# Altium PCB PCB1.PcbDoc
Units mil, origin at the board's own origin, x right, y up, seen from the top; angles counter-clockwise.
Board outline 3200 x 1060 mil, 4 copper layers (Top Layer, Ground plane, Power plane, Bottom Layer); 137 components, 69 nets, 412 pads, 145 vias.
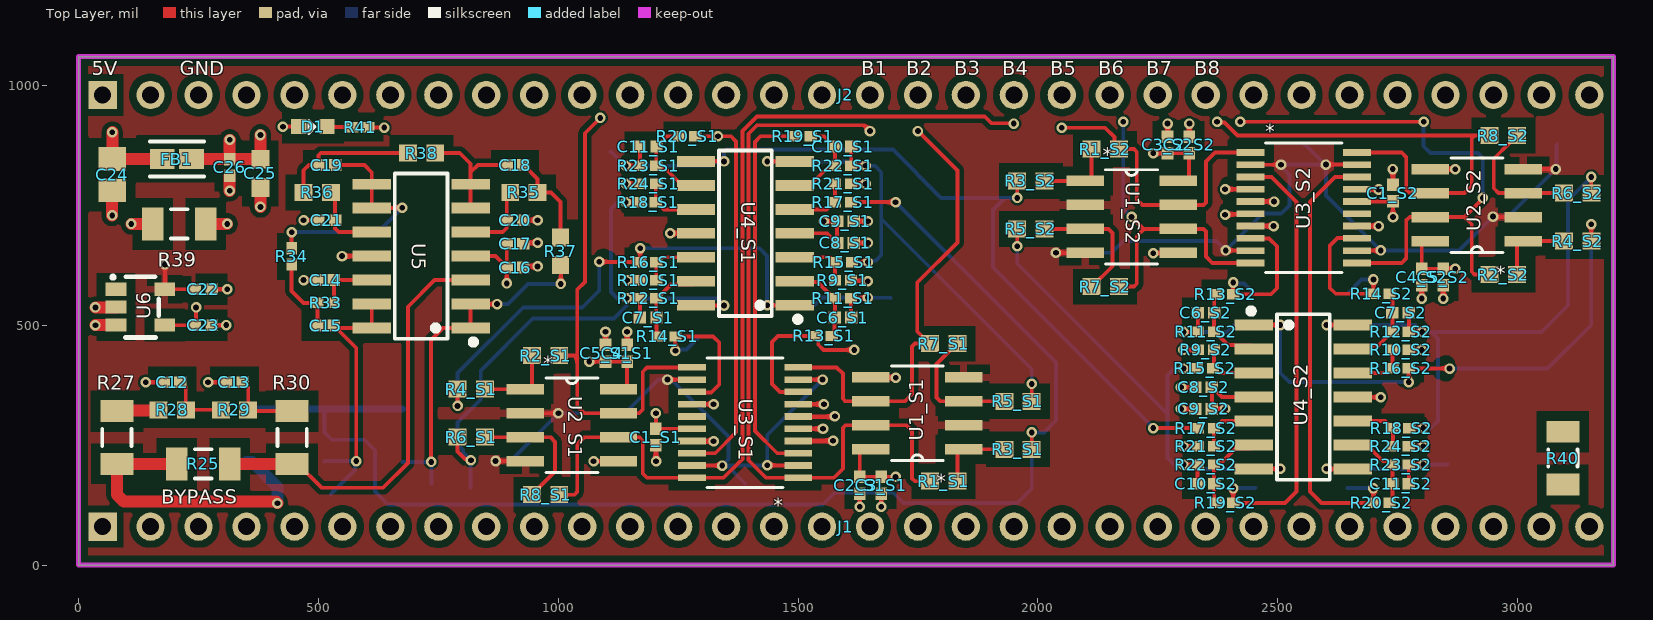
[diagram p0: Top Layer view]
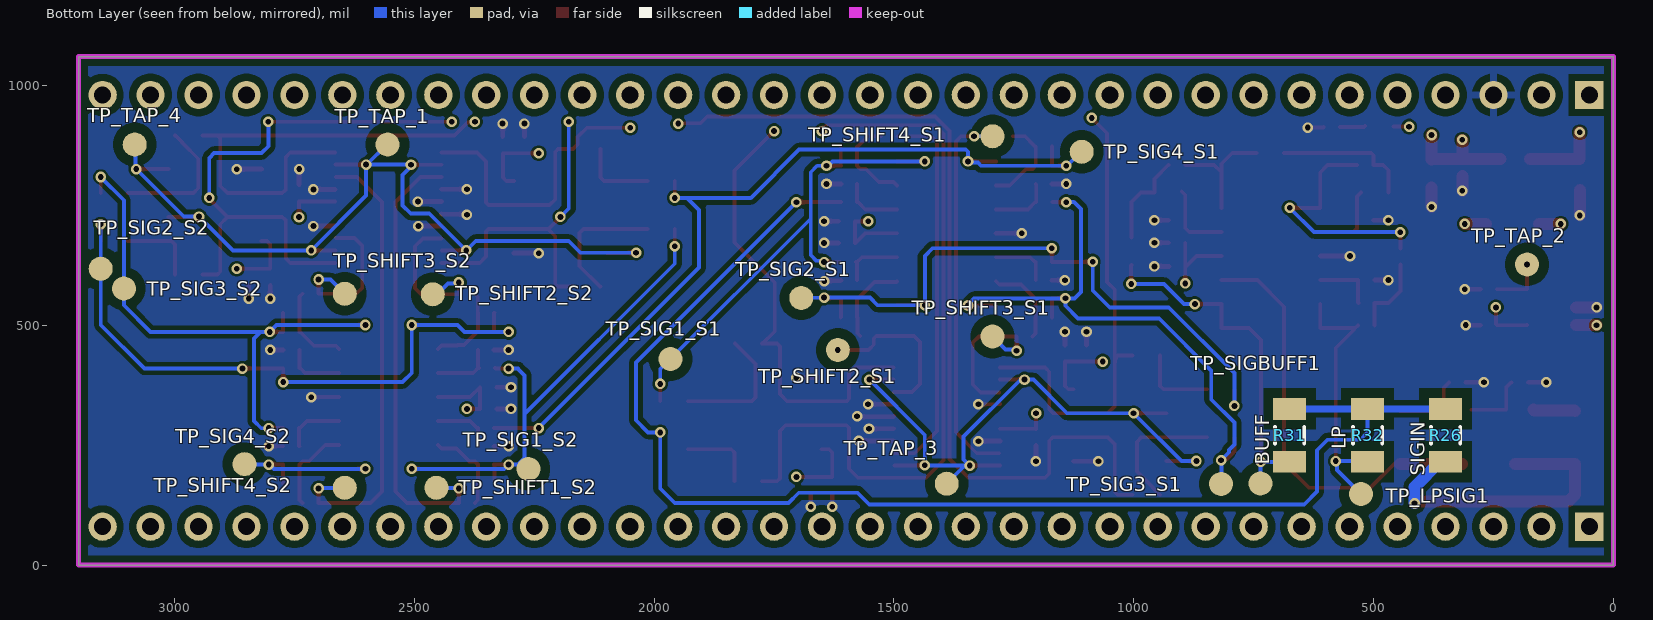
[diagram p1: Bottom Layer view, seen from below]
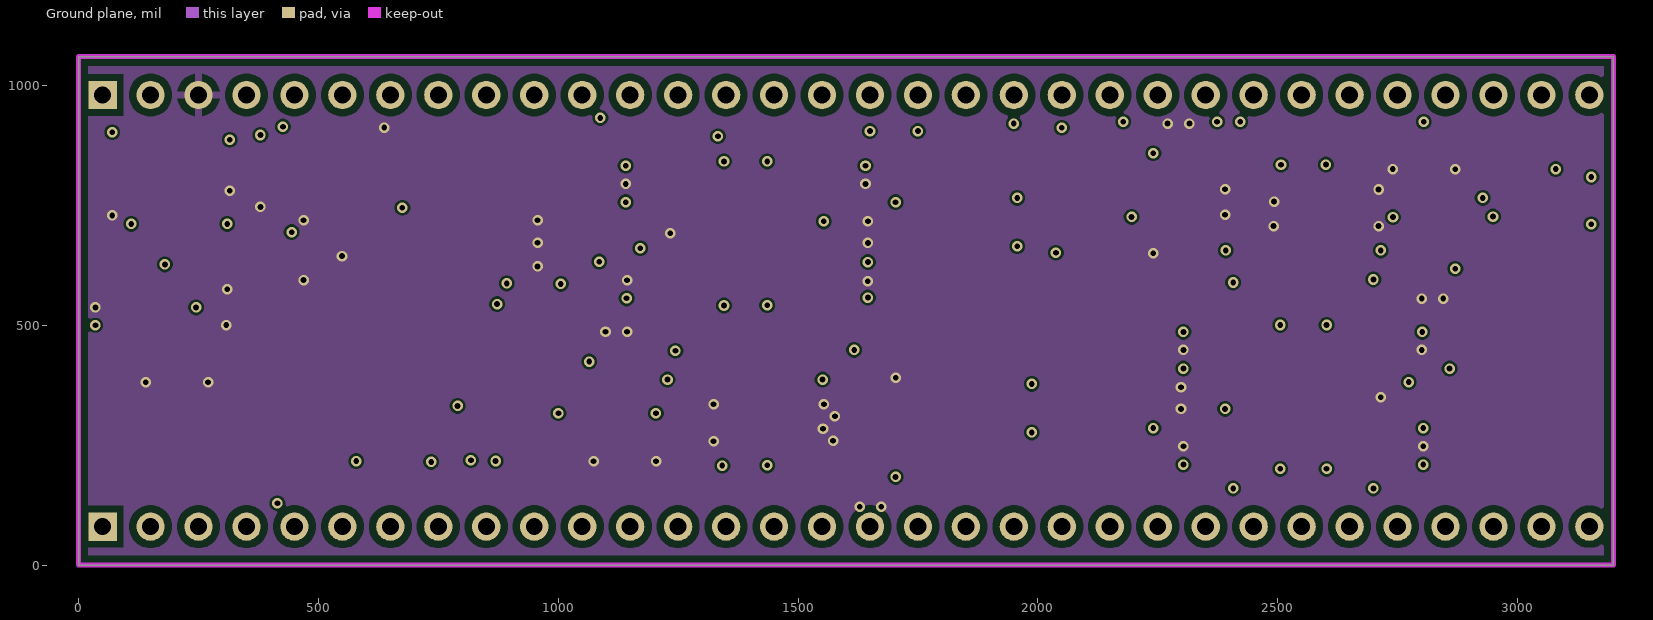
[diagram p2: Ground plane]
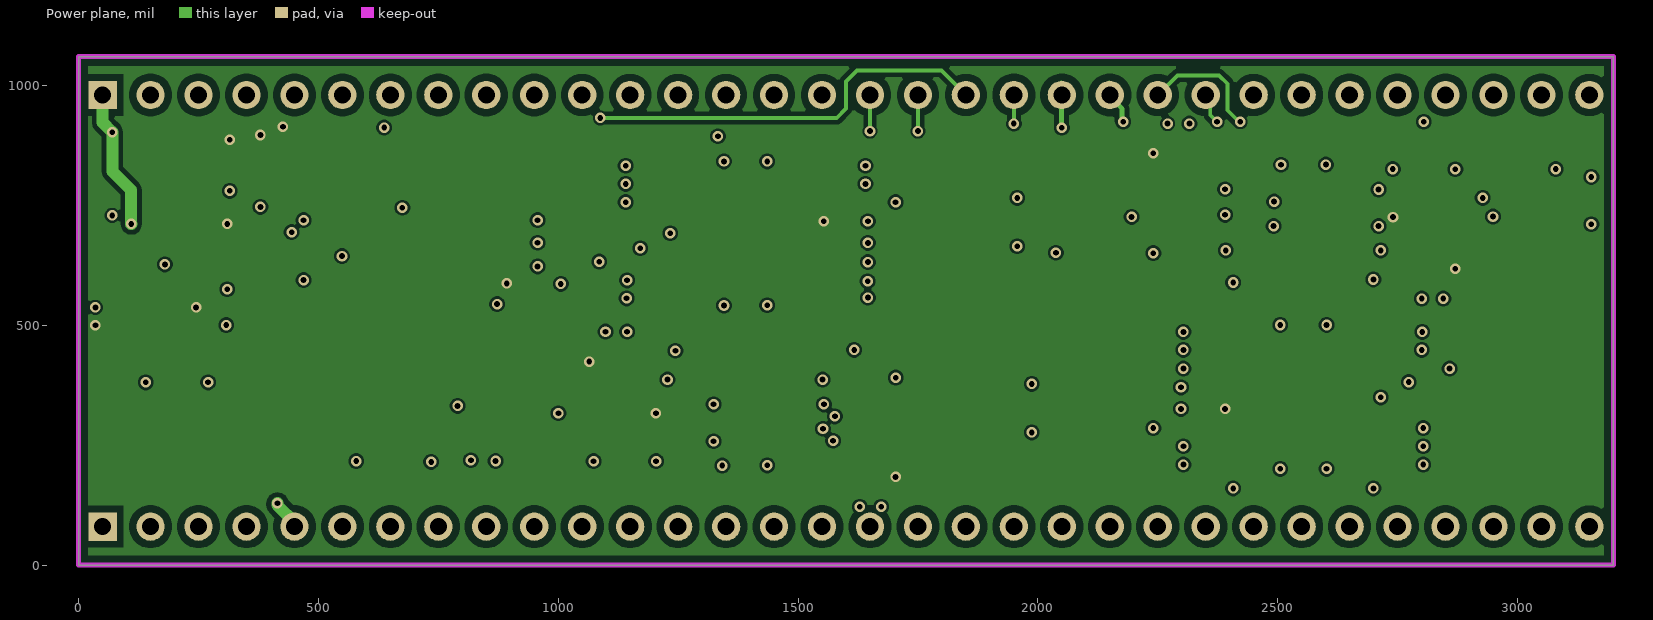
[diagram p3: Power plane]
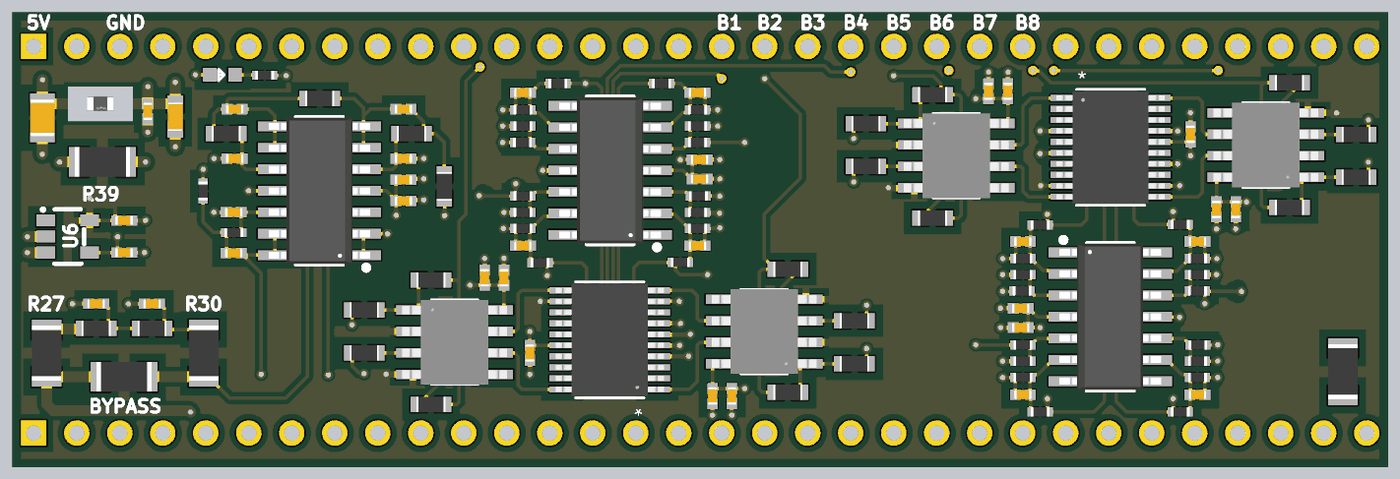
[diagram p4: 3D render of the assembled board from above, using the file's embedded part models]
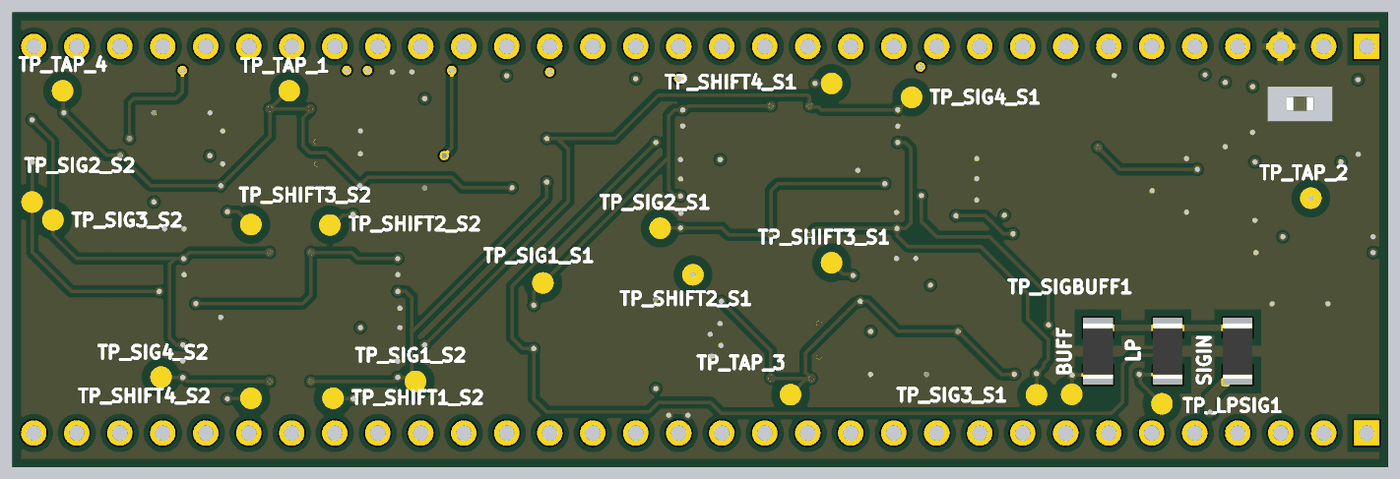
[diagram p5: 3D render of the assembled board from below, using the file's embedded part models]

## Layer stack, top to bottom
Top Solder: solder mask 0.4, Solder Resist, Dk 3.3
Top Layer: signal copper 1.4
Dielectric 1: prepreg 12.6, PP-006, Dk 4.1
Ground plane: signal copper 0.689
Dielectric1: core 12.6, FR-4, Dk 4.3
Power plane: signal copper 0.689
Dielectric 2: prepreg 12.6, PP-006, Dk 4.1
Bottom Layer: signal copper 1.4
Bottom Solder: solder mask 0.4, Solder Resist, Dk 3.3

## Board outline
0,0 3200,0 3200,1060 0,1060

## Design rules (kind name [scope] priority, off if disabled: settings)
Clearance Clearance_Poly_Via [InPoly vs IsVia] p1: gap=5 ignorepadtopadclearanceinfootprint=FALSE except(0: Arc-Hole Track-Hole SMDPad-Hole THPad-Hole Via-Hole Fill-Hole Poly-Hole Region-Hole Text-Hole)
Clearance Clearance_Poly_Poly [(InPoly) vs (InPoly)] p2: gap=15 ignorepadtopadclearanceinfootprint=FALSE except(0: Arc-Hole Track-Hole SMDPad-Hole THPad-Hole Via-Hole Fill-Hole Poly-Hole Region-Hole Text-Hole)
Clearance Clearance_Poly_Wires [InPoly vs IsWire] p3: gap=10 ignorepadtopadclearanceinfootprint=FALSE except(0: Arc-Hole Track-Hole SMDPad-Hole THPad-Hole Via-Hole Fill-Hole Poly-Hole Region-Hole Text-Hole)
Clearance Clearance_Poly_KO [(Layer = 'KeepOutLayer') vs (InPoly)] p4: gap=15 ignorepadtopadclearanceinfootprint=FALSE except(0: Arc-Hole Track-Hole SMDPad-Hole THPad-Hole Via-Hole Fill-Hole Poly-Hole Region-Hole Text-Hole)
Clearance Clearance_Poly_Top_Btm [OnLayer('Top Layer') or OnLayer('Bottom Layer') vs InPoly] p5: gap=20 ignorepadtopadclearanceinfootprint=FALSE except(0: Arc-Hole Track-Hole SMDPad-Hole THPad-Hole Via-Hole Fill-Hole Poly-Hole Region-Hole Text-Hole)
Clearance Clearance_KO_All [(Layer = 'KeepOutLayer')] p6: gap=0 ignorepadtopadclearanceinfootprint=FALSE
Clearance Clearance_Poly_All [(InPoly)] p7: gap=15 ignorepadtopadclearanceinfootprint=FALSE except(0: Arc-Hole Track-Hole SMDPad-Hole THPad-Hole Via-Hole Fill-Hole Poly-Hole Region-Hole Text-Hole)
Clearance Clearance_All [All] p8: gap=5 ignorepadtopadclearanceinfootprint=FALSE except(0: Arc-Hole Track-Hole SMDPad-Hole THPad-Hole Via-Hole Fill-Hole Poly-Hole Region-Hole Text-Hole)
ComponentClearance [All] p1 off: gap=10 collisioncheckmode=3 verticalgap=10 showdistances=FALSE
DiffPairsRouting [All] p1: maxlimit=10 minlimit=5 mostfreqgap=5 toplayer_minwidth=5 toplayer_maxwidth=25 toplayer_prefwidth=5 midlayer1_minwidth=5 midlayer1_maxwidth=25 midlayer1_prefwidth=5 midlayer2_minwidth=5 midlayer2_maxwidth=25 midlayer2_prefwidth=5 bottomlayer_minwidth=5 bottomlayer_maxwidth=25 bottomlayer_prefwidth=5 maxuncoupledlength=500
FabricationTestPointUsage TestPointUsage [All] p1 off: valid=0 allowmultiple=FALSE
FabricationTestpoint Testpoint [All] p1 off: side=3 testpointundercomponent=TRUE minsize=40 maxsize=100 preferedsize=60 minholesize=0 maxholesize=40 preferedholesize=32 testpointgrid=1 allowsidetop=TRUE allowsidebottom=TRUE usegrid=TRUE gridtolerance=0.01
FanoutControl Fanout_BGA [IsBGA] p1 off: bgadir=Out bgaviamode=Centered fanoutstyle=Auto fanoutdirection=Alternating viagrid=1 // Fanout_BGA (Default Rule)
FanoutControl Fanout_LCC [IsLCC] p2 off: bgadir=Out bgaviamode=Centered fanoutstyle=Auto fanoutdirection=Alternating viagrid=1 // Fanout_LCC (Default Rule)
FanoutControl Fanout_SOIC [IsSOIC] p3 off: bgadir=Out bgaviamode=Centered fanoutstyle=Auto fanoutdirection=Alternating viagrid=1 // Fanout_SOIC (Default Rule)
FanoutControl Fanout_Small [(CompPinCount < 5)] p4 off: bgadir=Out bgaviamode=Centered fanoutstyle=Auto fanoutdirection=OutThenIn viagrid=1 // Fanout_Small (Default Rule)
FanoutControl Fanout_Default [All] p5 off: bgadir=Out bgaviamode=Centered fanoutstyle=Auto fanoutdirection=Alternating viagrid=1 // Fanout_Default (Default Rule)
Height [All] p1 off: minheight=0 maxheight=1000 prefheight=500
HoleSize [All] p1 off: absolutevalues=TRUE maxlimit=100 minlimit=1 maxpercent=80.000 minpercent=20.000
HoleToHoleClearance [All] p1 off: gap=10 allowstackedmicrovias=TRUE
LayerPairs [All] p1 off: enforce=TRUE
MinimumSolderMaskSliver [All] p1 off: minsoldermaskwidth=10
NetAntennae [All] p1 off: netantennaetolerance=0
PasteMaskExpansion [All] p1 off: expansion=0
PlaneClearance [All] p1 off: clearance=20
PlaneConnect [All] p1 off: planeconnectstyle=Relief reliefexpansion=20 reliefentries=4 reliefconductorwidth=20 reliefairgap=15
PolygonConnect PolygonConnect_vias [All vs isVia] p1: connectstyle=Direct reliefconductorwidth=10 reliefentries=4 polygonreliefangle="90 Angle" airgapwidth=10
PolygonConnect [All] p2: connectstyle=Relief reliefconductorwidth=15 reliefentries=4 polygonreliefangle="90 Angle" airgapwidth=15
RoutingCorners [All] p1 off: cornerstyle=45-Degree minsetback=100 maxsetback=100
RoutingLayers [All] p1 off: top layer_v5=FALSE mid layer 1_v5=TRUE mid layer 2_v5=TRUE bottom layer_v5=TRUE
RoutingPriority [All] p1 off: routingpriority=0
RoutingTopology [All] p1 off: topology=Shortest
RoutingVias [All] p1: holewidth=12 width=22 viastyle="Through Hole" minholewidth=6 minwidth=15 maxholewidth=50 maxwidth=50
SilkToSilkClearance [All] p1 off: silktosilkclearance=10
SilkToSolderMaskClearance SilkscreenOverComponentPads [IsPad] p1 off: minsilkscreentomaskgap=10 clearancetoexposedcopper=TRUE
SolderMaskExpansion SolderMaskExpansion_via [IsVia] p1: expansion=0 istentingtop=FALSE
SolderMaskExpansion [All] p2 off: expansion=4 istentingtop=FALSE
SupplyNets "Schematic Supply Nets_3" [InNet('GND')] p1: voltage=0.000
SupplyNets "Schematic Supply Nets_2" [InNet('TAP')] p2: voltage=0.000
SupplyNets "Schematic Supply Nets_1" [InNet('+5')] p3: voltage=0.000
SupplyNets "Schematic Supply Nets" [InNet('+5IN')] p4: voltage=0.000
Width [All] p1: maxlimit=100 minlimit=5 preferedwidth=8
6 further rules are at their usual default settings.

## Classes and differential pairs
channel class CtDPS_Stage: S1 S2
component class S2: C1_S2 C2_S2 C3_S2 C4_S2 C5_S2 C6_S2 C7_S2 C8_S2 C9_S2 C10_S2 C11_S2 R1_S2 R2_S2 R3_S2 R4_S2 R5_S2 R6_S2 R7_S2 R8_S2 R9_S2 R10_S2 R11_S2 R12_S2 R13_S2 R14_S2 R15_S2 R16_S2 R17_S2 R18_S2 R19_S2 R20_S2 R21_S2 R22_S2 R23_S2 R24_S2 TP_SHIFT1_S2 TP_SHIFT2_S2 TP_SHIFT3_S2 TP_SHIFT4_S2 TP_SIG1_S2 TP_SIG2_S2 TP_SIG3_S2 TP_SIG4_S2 U1_S2 U2_S2 U3_S2 U4_S2
component class S1: C1_S1 C2_S1 C3_S1 C4_S1 C5_S1 C6_S1 C7_S1 C8_S1 C9_S1 C10_S1 C11_S1 R1_S1 R2_S1 R3_S1 R4_S1 R5_S1 R6_S1 R7_S1 R8_S1 R9_S1 R10_S1 R11_S1 R12_S1 R13_S1 R14_S1 R15_S1 R16_S1 R17_S1 R18_S1 R19_S1 R20_S1 R21_S1 R22_S1 R23_S1 R24_S1 TP_SHIFT2_S1 TP_SHIFT3_S1 TP_SHIFT4_S1 TP_SIG1_S1 TP_SIG2_S1 TP_SIG3_S1 TP_SIG4_S1 U1_S1 U2_S1 U3_S1 U4_S1
component class CtDSP_IO: C12 C13 C14 C15 C16 C17 C18 C19 C20 C21 C22 C23 C24 C25 C26 D1 FB1 J1 J2 R25 R26 R27 R28 R29 R30 R31 R32 R33 R34 R35 R36 R37 R38 R39 R40 R41 TP_LPSIG1 TP_SIGBUFF1 TP_TAP_1 TP_TAP_2 TP_TAP_3 TP_TAP_4 U5 U6

## Components (designator, comment, footprint, x,y, rotation, side; value= is the part's Value field where it differs from the comment)
C1_S1 "100nF" C_0402 1203.61,266.54 r270 top (schematic designator C1)
C1_S2 "100nF" C_0402 2740.46,775.46 r90 top (schematic designator C1)
C2_S1 "100nF" C_0402 1628.61,166.28 r270 top (schematic designator C2)
C2_S2 "100nF" C_0402 2315.46,875.72 r90 top (schematic designator C2)
C3_S1 "2.2uF" C_0402 1673.61,166.28 r90 top (schematic designator C3)
C3_S2 "2.2uF" C_0402 2270.46,875.72 r270 top (schematic designator C3)
C4_S1 "100nF" C_0402 1143.61,441.54 r90 top (schematic designator C4)
C4_S2 "100nF" C_0402 2800.46,600.46 r270 top (schematic designator C4)
C5_S1 "2.2uF" C_0402 1098.61,441.54 r270 top (schematic designator C5)
C5_S2 "2.2uF" C_0402 2845.46,600.46 r90 top (schematic designator C5)
C6_S1 "1pF" C_0402 1593.61,516 r0 top (schematic designator C6)
C6_S2 "1pF" C_0402 2350.46,526 r180 top (schematic designator C6)
C7_S1 "1pF" C_0402 1187.61,516 r0 top (schematic designator C7)
C7_S2 "1pF" C_0402 2756.46,526 r180 top (schematic designator C7)
C8_S1 "100nF" C_0402 1598.61,671.54 r0 top (schematic designator C8)
C8_S2 "100nF" C_0402 2345.46,370.46 r180 top (schematic designator C8)
C9_S1 "10uF" C_0402 1598.61,716.54 r180 top (schematic designator C9)
C9_S2 "10uF" C_0402 2345.46,325.46 r0 top (schematic designator C9)
C10_S1 "1pF" C_0402 1593.61,872.54 r0 top (schematic designator C10)
C10_S2 "1pF" C_0402 2350.46,169.46 r180 top (schematic designator C10)
C11_S1 "1pF" C_0402 1187.61,872.54 r0 top (schematic designator C11)
C11_S2 "1pF" C_0402 2756.46,169.46 r180 top (schematic designator C11)
C12 "100nF" C_0402 195,380.88 r0 top
C13 "10nF" C_0402 325,380.88 r0 top
C14 "22nF" C_0402 515,594.03 r180 top locked
C15 "100nF" C_0402 515,499.21 r0 top locked
C16 "10uF" C_0402 910,620.25 r0 top locked
C17 "100nF" C_0402 910,669.63 r180 top locked
C18 "100nF" C_0402 910,834.01 r0 top locked
C19 "10nF" C_0402 517.36,834.01 r180 top locked
C20 "100nF" C_0402 910,719.01 r180 top locked
C21 "4.7nF" C_0402 517.36,719.01 r0 top locked
C22 "0.1uF" C_0402 260,575 r0 top
C23 "0.1uF" C_0402 260,500 r0 top
C24 "47uF" C_0805 70.21,813.95 r90 top
C25 "1uF" C_0603 379.07,816.45 r90 top
C26 "0.1uF" C_0402 314.88,829.05 r270 top
D1 "LED_0603" LED_6003 518.13,914.37 r180 top
FB1 "BLM18PG121SN1D" BLM18PG121SN1D 204.88,846.38 r0 top
J1 "DIP32" DIP32 50,80 r0 top
J2 "DIP32" DIP32 50,980 r0 top
R1_S1 "47k" RES_0603 1803.61,174.73 r180 top locked (schematic designator R1)
R1_S2 "47k" RES_0603 2140.46,867.27 r0 top (schematic designator R1)
R2_S1 "47k" RES_0603 973.61,436.54 r0 top (schematic designator R2)
R2_S2 "47k" RES_0603 2970.46,605.46 r180 top (schematic designator R2)
R3_S1 "75" RES_0603 1958.61,241.28 r180 top locked (schematic designator R3)
R3_S2 "75" RES_0603 1985.46,800.72 r0 top (schematic designator R3)
R4_S1 "75" RES_0603 818.61,366.54 r0 top (schematic designator R4)
R4_S2 "75" RES_0603 3125.46,675.46 r180 top (schematic designator R4)
R5_S1 "75" RES_0603 1958.61,341.28 r180 top locked (schematic designator R5)
R5_S2 "75" RES_0603 1985.46,700.72 r0 top (schematic designator R5)
R6_S1 "75" RES_0603 818.61,266.54 r0 top (schematic designator R6)
R6_S2 "75" RES_0603 3125.46,775.46 r180 top (schematic designator R6)
R7_S1 "47k" RES_0603 1803.61,461.54 r180 top locked (schematic designator R7)
R7_S2 "47k" RES_0603 2140.46,580.46 r0 top (schematic designator R7)
R8_S1 "47k" RES_0603 973.61,146.54 r0 top (schematic designator R8)
R8_S2 "47k" RES_0603 2970.46,895.46 r180 top (schematic designator R8)
R9_S1 "10K" RES_0402 1593.61,593.56 r0 top (schematic designator R9)
R9_S2 "10K" RES_0402 2350.46,448.44 r180 top (schematic designator R9)
R10_S1 "10K" RES_0402 1187.61,593.56 r180 top (schematic designator R10)
R10_S2 "10K" RES_0402 2756.46,448.44 r0 top (schematic designator R10)
R11_S1 "10K" RES_0402 1593.61,556 r0 top (schematic designator R11)
R11_S2 "10K" RES_0402 2350.46,486 r180 top (schematic designator R11)
R12_S1 "10K" RES_0402 1187.61,556 r0 top (schematic designator R12)
R12_S2 "10K" RES_0402 2756.46,486 r180 top (schematic designator R12)
R13_S1 "5K" RES_0402 1553.61,477.5 r0 top (schematic designator R13)
R13_S2 "5K" RES_0402 2390.46,564.5 r180 top (schematic designator R13)
R14_S1 "5K" RES_0402 1227.61,476.54 r0 top (schematic designator R14)
R14_S2 "5K" RES_0402 2716.46,565.46 r180 top (schematic designator R14)
R15_S1 "5K" RES_0402 1595.61,631.54 r180 top (schematic designator R15)
R15_S2 "5K" RES_0402 2348.46,410.46 r0 top (schematic designator R15)
R16_S1 "5K" RES_0402 1187.61,631.54 r180 top (schematic designator R16)
R16_S2 "5K" RES_0402 2756.46,410.46 r0 top (schematic designator R16)
R17_S1 "5K" RES_0402 1593.61,756.54 r180 top (schematic designator R17)
R17_S2 "5K" RES_0402 2350.46,285.46 r0 top (schematic designator R17)
R18_S1 "5K" RES_0402 1186.61,756.54 r180 top (schematic designator R18)
R18_S2 "5K" RES_0402 2757.46,285.46 r0 top (schematic designator R18)
R19_S1 "5K" RES_0402 1510,893.92 r0 top (schematic designator R19)
R19_S2 "5K" RES_0402 2390.46,129.46 r180 top (schematic designator R19)
R20_S1 "5K" RES_0402 1269,893.92 r0 top (schematic designator R20)
R20_S2 "5K" RES_0402 2716.46,129.46 r180 top (schematic designator R20)
R21_S1 "10K" RES_0402 1593.61,794.54 r180 top (schematic designator R21)
R21_S2 "10K" RES_0402 2350.46,247.46 r0 top (schematic designator R21)
R22_S1 "10K" RES_0402 1593.61,832.54 r0 top (schematic designator R22)
R22_S2 "10K" RES_0402 2350.46,209.46 r180 top (schematic designator R22)
R23_S1 "10K" RES_0402 1187.61,832.54 r0 top (schematic designator R23)
R23_S2 "10K" RES_0402 2756.46,209.46 r180 top (schematic designator R23)
R24_S1 "10K" RES_0402 1187.61,794.54 r0 top (schematic designator R24)
R24_S2 "10K" RES_0402 2756.46,247.46 r180 top (schematic designator R24)
R25 "0" RES_1206 260,210.76 r0 top
R26 "0" RES_1206 350,270.35 r90 bottom
R27 "0" RES_1206 80,265.88 r90 top
R28 "330" RES_0603 195,323.62 r0 top
R29 "3.3k" RES_0603 325,323.62 r0 top
R30 "0" RES_1206 445,265.88 r270 top
R31 "0" RES_1206 675,270.35 r90 bottom
R32 "0" RES_1206 512.5,270.35 r90 bottom
R33 "220" RES_0402 515,546.62 r180 top locked
R34 "470" RES_0402 444.14,643.52 r90 top locked
R35 "330" RES_0603 928.46,776.76 r180 top locked
R36 "2.2k" RES_0603 497.68,776.76 r180 top locked
R37 "150" RES_0603 1005,654.01 r90 top locked
R38 "3.3k" RES_0603 715,859.01 r0 top locked
R39 "0" RES_1206 209.88,711.15 r0 top
R40 "0" RES_1206 3094.53,222.96 r270 top
R41 "1k" RES_0402 587,913 r0 top
TP_LPSIG1 "TESTPOINT" TESTPOINT 526.22,148.05 r90 bottom
TP_SHIFT1_S2 "TESTPOINT" TESTPOINT 2454,161 r90 bottom (schematic designator TP_SHIFT1)
TP_SHIFT2_S1 "TESTPOINT" TESTPOINT 1616.98,448.44 r90 bottom (schematic designator TP_SHIFT2)
TP_SHIFT2_S2 "TESTPOINT" TESTPOINT 2461.46,564.5 r90 bottom (schematic designator TP_SHIFT2)
TP_SHIFT3_S1 "TESTPOINT" TESTPOINT 1294.53,476.54 r90 bottom (schematic designator TP_SHIFT3)
TP_SHIFT3_S2 "TESTPOINT" TESTPOINT 2645,565.46 r90 bottom (schematic designator TP_SHIFT3)
TP_SHIFT4_S1 "TESTPOINT" TESTPOINT 1294.53,893.92 r90 bottom (schematic designator TP_SHIFT4)
TP_SHIFT4_S2 "TESTPOINT" TESTPOINT 2645,161 r90 bottom (schematic designator TP_SHIFT4)
TP_SIG1_S1 "TESTPOINT" TESTPOINT 1965.98,429.52 r90 bottom (schematic designator TP_SIG1)
TP_SIG1_S2 "TESTPOINT" TESTPOINT 2262.19,200.4 r90 bottom (schematic designator TP_SIG1)
TP_SIG2_S1 "TESTPOINT" TESTPOINT 1693.29,556.8 r90 bottom (schematic designator TP_SIG2)
TP_SIG2_S2 "TESTPOINT" TESTPOINT 3154.01,617.79 r90 bottom (schematic designator TP_SIG2)
TP_SIG3_S1 "TESTPOINT" TESTPOINT 818,169 r90 bottom (schematic designator TP_SIG3)
TP_SIG3_S2 "TESTPOINT" TESTPOINT 3105.46,576.25 r90 bottom (schematic designator TP_SIG3)
TP_SIG4_S1 "TESTPOINT" TESTPOINT 1108.51,861.53 r90 bottom (schematic designator TP_SIG4)
TP_SIG4_S2 "TESTPOINT" TESTPOINT 2854.06,210.28 r90 bottom (schematic designator TP_SIG4)
TP_SIGBUFF1 "TESTPOINT" TESTPOINT 736,170 r90 bottom
TP_TAP_1 "TESTPOINT" TESTPOINT 2555.86,876.73 r90 bottom
TP_TAP_2 "TESTPOINT" TESTPOINT 180.01,626.79 r90 bottom
TP_TAP_3 "TESTPOINT" TESTPOINT 1389.92,169.46 r90 bottom
TP_TAP_4 "TP_TAP_4" TESTPOINT 3083.02,876.73 r90 bottom
U1_S1 "TLV3502AIDR" TLV3502AIDR 1748.61,316.28 r180 top locked (schematic designator U1)
U1_S2 "TLV3502AIDR" TLV3502AIDR 2195.46,725.72 r0 top (schematic designator U1)
U2_S1 "TLV3502AIDR" TLV3502AIDR 1028.61,291.54 r0 top (schematic designator U2)
U2_S2 "TLV3502AIDR" TLV3502AIDR 2915.46,750.46 r180 top (schematic designator U2)
U3_S1 "ADG734BRUZ-REEL" ADG734BRUZ-REEL 1389.61,296.97 r180 top (schematic designator U3)
U3_S2 "ADG734BRUZ-REEL" ADG734BRUZ-REEL 2554.46,745.03 r0 top (schematic designator U3)
U4_S1 "ADA4891-4ARZ-R7" ADA4891-4ARZ-R7 1388.61,681.54 r180 top (schematic designator U4)
U4_S2 "ADA4891-4ARZ-R7" ADA4891-4ARZ-R7 2555.46,360.46 r0 top (schematic designator U4)
U5 "ADA4891-4ARZ-R7" ADA4891-4ARZ-R7 712.37,634.01 r180 top locked
U6 "REF2025AIDDCR" REF2025AIDDCR 77.7,574.98 r0 top

## Footprints (in the part's own frame and the unit in brackets; to place one, negate y for a bottom-side part, rotate by r counter-clockwise, add the part's x,y. Pads: shape width x height; smd on the part's side, far side on the other; paste and mask are expansions set on the pad)
ADA4891-4ARZ-R7 [mil]
  rect 80.24x22.6 smd: 1(-104.88,139.98) 2(-104.88,89.98) 3(-104.88,39.98) 4(-104.88,-10.02) 5(-104.88,-60.02) 6(-104.88,-110.02) 7(-104.88,-160.02) 8(101.34,-160.02) 9(101.34,-110.02) 10(101.34,-60.02) 11(101.34,-10.02) 12(101.34,39.98) 13(101.34,89.98) 14(101.34,139.98)
  silkscreen extent -117,-183 53,175, body extent -120,-180 116,161, height 69
ADG734BRUZ-REEL [mil]
  rect 58x14 smd: 1(-111,115.16) 2(-111,89.57) 3(-111,63.98) 4(-111,38.39) 5(-111,12.8) 6(-111,-12.8) 7(-111,-38.39) 8(-111,-63.98) 9(-111,-89.57) 10(-111,-115.16) 11(111,-115.16) 12(111,-89.57) 13(111,-63.98) 14(111,-38.39) 15(111,-12.8) 16(111,12.8) 17(111,38.39) 18(111,63.98) 19(111,89.57) 20(111,115.16)
  silkscreen extent -79,-135 79,135, body extent -126,-130 126,130, height 47
BLM18PG121SN1D [mil]
  rect 51.42x41.66 smd paste+0 mask+0: 1(-30.55,0) 2(30.55,0)
  silkscreen extent -56,-37 56,37, body extent -76,-41 76,41, height 10
C_0402 [mm]
  rect 0.66x0.62 smd paste+0 mask+0.051: 1(-0.44,0) 2(0.44,0)
  body extent -0.53,-0.28 0.53,0.28, height 0.55
C_0603 [mm]
  rect 1x0.95 smd: 1(-0.75,0) 2(0.75,0)
  body extent -0.85,-0.45 0.85,0.45, height 0.9
C_0805 [mm]
  rect 1.25x1.45 smd: 1(-0.825,0) 2(0.825,0)
  body extent -1.1,-0.72 1.1,0.72, height 1.45
DIP32 [mm]
  rect 1.5x1.5 hole 0.9: 1(0,0)
  round 1.5 hole 0.9: 2(2.54,0) 3(5.08,0) 4(7.62,0) 5(10.16,0) 6(12.7,0) 7(15.24,0) 8(17.78,0) 9(20.32,0) 10(22.86,0) 11(25.4,0) 12(27.94,0) 13(30.48,0) 14(33.02,0) 15(35.56,0) 16(38.1,0) 17(40.64,0) 18(43.18,0) 19(45.72,0) 20(48.26,0) 21(50.8,0) 22(53.34,0) 23(55.88,0) 24(58.42,0) 25(60.96,0) 26(63.5,0) 27(66.04,0) 28(68.58,0) 29(71.12,0) 30(73.66,0) 31(76.2,0) 32(78.74,0)
LED_6003 [mm]
  rect 0.8x0.8 smd: 1(0.004,0.009) 2(1.502,0.009)
  silkscreen extent 0.63,-0.31 0.97,0.37, body extent -0.05,-0.39 1.55,0.41, height 0.35
REF2025AIDDCR [mm]
  rect 1.1x0.7 smd: 1(0.006,0.002) 2(0.006,-0.947) 3(0.006,-1.899) 4(2.594,-1.899) 5(2.594,0)
  silkscreen extent -0.22,-2.56 2.27,0.7
RES_0402 [mm]
  rect 0.65x0.55 smd paste+0 mask+0.05: 1(-0.425,0) 2(0.425,0)
  body extent -0.55,-0.28 0.55,0.28, height 0.35
RES_0603 [mm]
  rect 0.95x0.9 smd: 1(-0.725,0) 2(0.725,0)
  body extent -0.85,-0.45 0.85,0.45, height 0.55
RES_1206 [mm]
  rect 1.15x1.75 smd: 1(-1.4,0) 2(1.4,0)
  silkscreen extent -0.45,-0.77 0.45,0.77, body extent -1.63,-0.87 1.63,0.87, height 0.65
TESTPOINT [mil]
  round 50 smd paste-99999 mask+0: 1(0,0)
TLV3502AIDR [mil]
  rect 78x22 smd: 1(-97,75) 2(-97,25) 3(-97,-25) 4(-97,-75) 5(97,-75) 6(97,-25) 7(97,25) 8(97,75)
  silkscreen extent -54,-98 54,98, body extent -122,-99 122,99, height 69

## Part data
C1_S1 C1_S2 C2_S1 C2_S2 C4_S1 C4_S2 C8_S1 C8_S2 C12 C15 C17 C18 C20 C22 C23 C26: library part C_0402, LCSC Part #=C1525
C3_S1 C3_S2 C5_S1 C5_S2: library part C_0402, LCSC Part #=C12530
C6_S1 C6_S2 C7_S1 C7_S2 C10_S1 C10_S2 C11_S1 C11_S2: library part C_0402, LCSC Part #=C1550
C9_S1 C9_S2 C16: library part C_0402, LCSC Part #=C15525
C13 C19: library part C_0402, LCSC Part #=C15195
C14: library part C_0402, LCSC Part #=C1532
C21: library part C_0402, LCSC Part #=C1538
C24: library part C_0805, LCSC Part #=C16780
C25: library part C_0603, LCSC Part #=C15849
D1: LCSC Part #=C2286
FB1: "-55℃~+125℃ 1 120Ω@100MHz 2A 50mΩ ±25% 0603 Ferrite Beads ROHS", LCSC Part #=C14709
R1_S1 R1_S2 R2_S1 R2_S2 R7_S1 R7_S2 R8_S1 R8_S2: library part RES_0603, LCSC Part #=C25819
R3_S1 R3_S2 R4_S1 R4_S2 R5_S1 R5_S2 R6_S1 R6_S2: library part RES_0603, LCSC Part #=C4275
R9_S1 R9_S2 R10_S1 R10_S2 R11_S1 R11_S2 R12_S1 R12_S2 R21_S1 R21_S2 R22_S1 R22_S2 R23_S1 R23_S2 R24_S1 R24_S2: library part RES_0402, LCSC Part #=C25744
R13_S1 R13_S2 R14_S1 R14_S2 R15_S1 R15_S2 R16_S1 R16_S2 R17_S1 R17_S2 R18_S1 R18_S2 R19_S1 R19_S2 R20_S1 R20_S2: library part RES_0402, LCSC Part #=C5948099
R25 R26 R27 R30 R31 R32 R39 R40: library part RES_1206, LCSC Part #=C17888
R28 R35: library part RES_0603, LCSC Part #=C23138
R29 R38: library part RES_0603, LCSC Part #=C22978
R33: library part RES_0402, LCSC Part #=C25091
R34: library part RES_0402, LCSC Part #=C25117
R36: library part RES_0603, LCSC Part #=C4190
R37: library part RES_0603, LCSC Part #=C22808
R41: library part RES_0402, LCSC Part #=C11702
TP_TAP_4: library part TESTPOINT
U1_S1 U1_S2 U2_S1 U2_S2: "Dual 4.5ns Push-pull Rail-to-Rail Input, Rail-to-Rail Output TTL Comparators", LCSC Part #=C131165
U3_S1 U3_S2: LCSC Part #=C579105
U4_S1 U4_S2 U5: "Quad Rail-to-Rail Op-Amp, 240 MHz, 170 V/µs, SOT-23-5", LCSC Part #=C654290
U6: LCSC Part #=C962078

## Via types
v1: diameter 22, hole 12, Top Layer to Bottom Layer, tented both sides, 137 vias
v2: diameter 22, hole 12, Top Layer to Bottom Layer, 8 vias

## Nets (pads, with @x,y where several pads share a name; then routed paths per layer and width w, separated by ;. In a path a pad name is that pad's centre, name@x,y a point inside that pad or via, vN(x,y) a via of type N, cw(c..) or ccw(c..) an arc to the next point about the centre after c; other vN are vias at no path point)
+5: C1_S1.1 C1_S2.1 C2_S1.1 C2_S2.1 C3_S1.2 C3_S2.2 C4_S1.1 C4_S2.1 C5_S1.2 C5_S2.2 C8_S1.1 C8_S2.1 C9_S1.2 C9_S2.2 C16.1 C17.2 C23.1 C25.2 C26.1 D1.2 FB1.2 R39.2 U1_S1.8 U1_S2.8 U2_S1.8 U2_S2.8 U3_S1.16 U3_S2.16 U4_S1.4 U4_S2.4 U5.4 U6.3 U6.4 | length 1768
  Top Layer w8: U6.4 180.01,500 C23.1 245,502.32 v1(245,536.98) ; v1(426,914) D1.2 ; U5.4 869.37,644.03 882.46,630.94 882.46,630.78 C16.1@890.67,622.58 ; v1(892.68,587) C16.1 ; C16.1@892.68,623.8 C17.2 C17.2@892.68,671.96 ; v1(1064.54,424.21) C5_S1.2 C4_S1.1 1143.61,373.54 1136.61,366.54 U2_S1.8 ; v1(1203.61,316.54) C1_S1.1 1203.92,284.17 U3_S1.16 ; U4_S1.4 1560.48,691.56 1580.5,671.54 C8_S1.1 C9_S1.2 v1(1553.61,716.54) ; U1_S1.8 1635.61,241.28 1628.61,234.28 C2_S1.1 C3_S1.2 v1(1703.27,183.6) ; v1(2240.8,858.4) C3_S2.2 C2_S2.1 2315.46,807.72 2308.46,800.72 U1_S2.8 ; v1(2390.46,325.46) C9_S2.2 C8_S2.1 2363.58,370.46 2383.59,350.44 U4_S2.4 ; U3_S2.16 2740.15,757.83 C1_S2.1 v1(2740.46,725.46) ; U2_S2.8 2807.46,675.46 2800.46,668.46 C4_S2.1 C5_S2.2 v1(2870.46,617.79)
  Top Layer w25: v1(35,500) 77.72,500 U6.3 ; FB1.2 C26.1 ; R39.2@265.09,711.06 v1(309.88,711.06) ; v1(315.18,886.57) 314.88,886.28 C26.1 ; v1(379.07,896.57) C25.2 378.67,846.38 C26.1
+5IN: C24.2 FB1.1 J2.1 R39.1 | length 498.7
  Top Layer w25: C24.2 v1@70.21,902.43 ; C24.2 FB1.1 ; v1(109.88,711.06) R39.1@154.68,711.06
  Power plane w25: J2.1 50,922.69 v1(70.24,902.45) 70.24,820.76 109.58,781.42 109.58,711.36 v1(109.88,711.06)
B1: J2.17 R1_S1.2 U1_S1.7 U3_S1.1 | length 1641.9
  Top Layer w8: v2(1650,904.75) 1637.75,917 1414.69,917 1396.99,899.3 1396.99,218.3 1433.48,181.81 U3_S1.1 1574.73,181.81 1593.61,200.69 1593.61,286.02 1598.86,291.28 1726.12,291.28 1737.73,279.67 1737.73,180.61 1743.61,174.73 R1_S1.2
  Power plane w8: J2.17@1649,1005 1650,1004 v2(1650,904.75)
B2: J2.18 R7_S1.2 U1_S1.6 U3_S1.10 | length 1065.4
  Top Layer w8: U3_S1.10 1580.44,412.13 1593.61,398.96 1593.61,346.54 1598.86,341.28 U1_S1.6 1722.42,341.28 1737.73,356.59 1737.73,455.65 1743.61,461.54 R7_S1.2@1774.08,461.54 ; v1(1750,904.75) 1832.15,822.6 1832.15,672.58 1748.61,589.03 1748.61,487.01 R7_S1.2@1774.08,461.54 ; R7_S1.2 R7_S1.2@1774.08,461.54
  Power plane w8: J2.18@1749,1005 1750,1004 v1(1750,904.75)
B3: J2.19 R2_S1.2 U2_S1.7 U3_S1.11 | length 1849
  Top Layer w8: R2_S1.2 1033.61,436.54 1039.49,430.65 ; v2(1087.78,932.25) 1087.49,932.25 1055.48,900.24 1055.48,589.99 1039.49,573.99 1039.49,430.65 ; U3_S1.11 1185.4,412.13 1176.11,402.84 1176.11,324.04 1168.61,316.54 U2_S1.7 1054.54,316.54 1039.49,331.59 1039.49,430.65
  Power plane w8: v2(1087.78,932.25) 1580.62,932.25 1600,951.63 1600,1008 1623,1031 1799,1031 J2.19
B4: J2.20 R8_S1.2 U2_S1.6 U3_S1.20 | length 1931.7
  Top Layer w8: R8_S1.2 1033.61,146.54 1039.49,152.42 1039.49,251.48 1054.54,266.54 U2_S1.6 1168.61,266.54 1176.11,259.04 1176.11,191.1 1185.4,181.81 U3_S1.20 1344.84,181.81 1383.99,220.96 1383.99,904.69 1414.3,935 1889.39,935 1903.45,920.94 1949.53,920.94 v2(1950,920.46)
  Power plane w8: v2(1950,920.46) J2.20 J2.20@1950,1003.14
B5: J2.21 R1_S2.2 U1_S2.7 U3_S2.1 | length 716.4
  Top Layer w8: v1(2050,911.64) 2140.22,911.64 2159.55,892.3 2159.55,876.73 R1_S2.2 2200.46,867.27 2206.34,861.39 2206.34,762.33 2217.95,750.72 U1_S2.7 2345.21,750.72 2350.46,755.98 2350.46,841.31 2369.34,860.19 U3_S2.1
  Power plane w10: J2.21@2049,1005 2049.5,1004.5 2049.5,912.14 v1(2050,911.64)
B6: J2.22 R7_S2.2 U1_S2.6 U3_S2.10 | length 777.2
  Top Layer w8: R7_S2.2 2200.46,580.46 2206.34,586.35 2206.34,685.41 2221.66,700.72 ; v2(2195.46,725.72) 2220.46,700.72 2221.66,700.72 ; U3_S2.10 2363.63,629.87 2350.46,643.04 2350.46,695.46 2345.21,700.72 U1_S2.6 2221.66,700.72
  Power plane w10: J2.22@2149,1005 2149.5,1004.5 J2.22@2149.5,980 ; J2.22 2150,976.69 2175.69,951 2175.69,926.55 v2(2177.98,924.25)
  Bottom Layer w8: v2(2177.98,924.25) 2177.98,743.2 v2(2195.46,725.72)
B7: J2.23 R2_S2.2 U2_S2.7 U3_S2.11 | length 1437.3
  Top Layer w8: v2(2422.11,924.25) v2(2804.57,924.25) ; U3_S2.11 2758.67,629.87 2767.96,639.16 2767.96,717.96 2775.46,725.46 U2_S2.7 2889.53,725.46 ; v1(2927.46,765.46) 2927.46,763.4 2889.53,725.46 ; R2_S2.2 2910.46,605.46 2904.58,611.35 2904.58,710.41 2889.53,725.46
  Power plane w8: J2.23 2290.91,1020.91 2377.87,1020.91 2395.46,1003.31 2395.46,948.26 2419.48,924.25 v2(2422.11,924.25)
  Bottom Layer w8: v2(2804.57,924.25) 2804.42,924.11 2804.42,873 2818.46,858.96 2917.46,858.96 2927.46,848.96 v1(2927.46,765.46)
B8: J2.24 R8_S2.2 U2_S2.6 U3_S2.20 | length 1074.8
  Top Layer w8: v2@2374.29,924.25 2375.68,922.87 2388.88,922.87 2416.28,895.46 2910.46,895.46 ; U3_S2.20 2758.67,860.19 2767.96,850.9 2767.96,782.96 2775.46,775.46 U2_S2.6 2889.53,775.46 2904.58,790.52 2904.58,889.58 2910.46,895.46 ; R8_S2.2 2910.46,895.46
  Power plane w8: J2.24@2349,1005 J2.24@2351.02,1005 ; J2.24 2359.52,970.48 2359.52,938.47 v2(2373.74,924.25)
GND: C1_S1.2 C1_S2.2 C2_S1.2 C2_S2.2 C3_S1.1 C3_S2.1 C4_S1.2 C4_S2.2 C5_S1.1 C5_S2.1 C8_S1.2 C8_S2.2 C9_S1.1 C9_S2.1 C12.1 C13.1 C14.2 C16.2 C17.1 C20.1 C21.1 C22.2 C23.2 C24.1 C25.1 C26.2 J2.3 R9_S1.2 R9_S2.2 R10_S1.2 R10_S2.2 R21_S1.1 R21_S2.1 R24_S1.1 R24_S2.1 R41.2 U1_S1.5 U1_S2.5 U2_S1.5 U2_S2.5 U3_S1.4 U3_S1.5 U3_S1.6 U3_S1.7 U3_S1.14 U3_S1.17 U3_S2.4 U3_S2.5 U3_S2.6 U3_S2.7 U3_S2.14 U3_S2.17 U4_S1.11 U4_S2.11 U5.11 U6.2 | length 2156.1
  Top Layer w8: R41.2 604.23,912.5 636.5,912.5 v1(637,912) ; U3_S1.14 1278.78,335.18 1323.82,335.18 v1(1324,335) ; U4_S2.11 2657.24,350.01 2714.56,350.01 v1(2714.99,349.58) ; R24_S2.1 v1(2803.46,247.46)
  Top Layer w10: U6.2@77.57,537.33 U6.2 ; v1(140,380.88) C12.1 ; v1(270,380.88) C13.1 ; C23.2 277.42,500.1 307.58,500.1 v1(307.68,500.2) ; C22.2 277.36,575.04 309.96,575.04 v1(310,575.08) ; C26.2 C26.2@315.03,811.58 ; v1@315.03,780.24 v1(315.18,780.09) ; v1(469.13,594.03) C14.2 ; v1(469.13,719.01) C21.1 ; v1(549.14,644.03) U5.11 ; C16.2@926.1,622.58 v1@955.12,622.58 ; C17.1@927.32,671.96 v1(957.01,671.96) ; C20.1 v1(957.01,719.01) ; v1(1073.61,216.54) U2_S1.5 ; C5_S1.1 v1(1098.61,486.54) ; v1(1140.61,794.54) R24_S1.1 ; C4_S1.2 v1(1143.61,486.54) ; v1(1143.61,593.56) R10_S1.2 ; C1_S1.2 1203.76,249.06 1203.76,216.69 v1(1203.92,216.54) ; v1(1233.61,691.56) U4_S1.11 ; U3_S1.17 1278.9,258.29 1323.71,258.29 v1(1324,258) ; U3_S1.4 1500.81,258.79 1572.79,258.79 v1(1573,259) ; U3_S1.5 1500.69,284.09 1551.91,284.09 v1(1552,284) ; U3_S1.6 1501.37,309 1576,309 v1(1577,310) ; U3_S1.7 1500.78,335.18 1553.82,335.18 v1(1554,335) ; R9_S1.2 1611.34,592.56 1644.13,592.56 v1(1645.13,591.56) ; R21_S1.1 v1(1640.61,794.54) ; C8_S1.2 v1(1645.61,671.54) ; C9_S1.1 v1(1645.61,716.54) ; v1(1628.61,121.54) C2_S1.2 ; U1_S1.5 1651.95,390.94 1703.27,390.94 v1(1703.61,390.6) ; v1(1673.61,121.54) C3_S1.1 ; v1(2240.8,650.22) 2241.05,650.47 2292.22,650.47 U1_S2.5 ; C3_S2.1 v1(2270.46,920.46) ; v1(2298.46,325.46) C9_S2.1 ; v1(2298.46,370.46) C8_S2.2 ; v1(2303.46,247.46) R21_S2.1 ; v1(2303.46,448.44) R9_S2.2 ; C2_S2.2 2315.71,893.29 2315.71,920.21 v1(2315.96,920.46) ; v1(2390.46,730.1) 2391.53,731.17 2442.4,731.17 U3_S2.6 ; v1(2390.46,783.42) U3_S2.4 ; U3_S2.7 v1(2491.49,706.65) ; U3_S2.5 v1(2492.46,757.83) ; U3_S2.14 v1(2710.46,706.65) ; U3_S2.17 2665.72,783.17 2710.21,783.17 v1(2710.46,782.92) ; v1(2740.15,825.46) 2740.31,825.31 2740.31,792.94 C1_S2.2 ; R10_S2.2 v1(2800.46,448.44) ; v1(2800.46,555.46) C4_S2.2 ; U2_S2.5 2818.54,825.39 2870.39,825.39 v1(2870.46,825.31) ; v1(2845.46,555.46) C5_S2.1
  Top Layer w25: v1@35.35,537.33 U6.2@77.57,537.33 ; v1(69.88,728.9) C24.1@69.88,781.42 ; v1@315.03,780.24 C26.2@315.03,811.58 ; v1(379.07,746.57) C25.1
  other v1: 35,536.98 957.01,622.58
LP_S1: C18.1 R38.2 U5.6 U5.7 | length 257.2
  Top Layer w8: R38.2 794.81,859.01 817.25,836.57 817.25,818.9 ; U5.6 U5.7 817.25,818.9 ; C18.1 832.36,834.01 817.25,818.9
LP_S2: C19.1 R34.2 U5.8 U5.9 | length 507.5
  Top Layer w8: R34.2 v1(444.14,694.03) ; C19.1 595.84,834.01 611.03,818.82 U5.8 U5.9 611.51,744.52 674.52,744.52 v1(675,745)
  Bottom Layer w8: v1(444.14,694.03) 624.03,694.03 v1(675,745)
LP_SIG: C15.2 R32.1 TP_LPSIG1.1 U5.13 U5.14 | length 582.7
  Top Layer w8: C15.2 533.11,499.21 C15.2@538.29,494.03 ; v1(579,216.69) 579,452.53 541.32,490.22 541.32,491.01 C15.2@538.29,494.03 ; U5.13 U5.14 C15.2@538.29,494.03
  Bottom Layer w8: R32.1 513.96,216.69 v1(579,216.69) 576.32,214.01 576.32,198.15 TP_LPSIG1.1
NetC6_S1_1: C6_S1.1 R11_S1.1 R13_S1.2 U4_S1.2 | length 179.3
  Top Layer w8: U4_S1.2 1495.06,589.99 1540.92,589.99 1574.91,556 R11_S1.1 1576.87,516.59 C6_S1.1 1576.28,483.45 R13_S1.2
NetC6_S2_1: C6_S2.1 R11_S2.1 R13_S2.2 U4_S2.2 | length 179.3
  Top Layer w8: R13_S2.2 2367.79,558.55 C6_S2.1 2367.2,525.41 R11_S2.1 2369.17,486 2396.7,458.46 2409.78,458.46 2410.5,457.74 2443.28,457.74 U4_S2.2
NetC7_S1_2: C7_S1.2 R12_S1.2 R14_S1.1 U4_S1.13 | length 179.8
  Top Layer w8: R14_S1.1 1204.93,482.48 C7_S1.2 1204.34,516.59 R12_S1.2 1206.31,556 1235.15,584.84 1280.56,584.84 U4_S1.13
NetC7_S2_2: C7_S2.2 R12_S2.2 R14_S2.1 U4_S2.13 | length 179.8
  Top Layer w8: U4_S2.13 2663.51,457.16 2708.92,457.16 2737.76,486 R12_S2.2 2739.73,525.41 C7_S2.2 2739.14,559.52 R14_S2.1
NetC10_S1_1: C10_S1.1 R19_S1.2 R22_S1.1 U4_S1.6 | length 199
  Top Layer w8: U4_S1.6 1500.79,798.85 1531.68,798.85 1558.82,825.99 1570.33,825.99 R22_S1.1 1576.87,871.94 C10_S1.1 1575.5,872.54 1554.11,893.92 R19_S1.2
NetC10_S2_1: C10_S2.1 R19_S2.2 R22_S2.1 U4_S2.6 | length 183.1
  Top Layer w8: R19_S2.2 2367.79,135.41 C10_S2.1 2367.2,170.06 R22_S2.1 2373.74,216.01 2385.25,216.01 2412.39,243.15 2443.28,243.15 U4_S2.6
NetC11_S1_2: C11_S1.2 R20_S1.1 R23_S1.2 U4_S1.9 | length 196.3
  Top Layer w8: R20_S1.1 1227.1,893.92 1205.72,872.54 C11_S1.2 1204.34,871.94 R23_S1.2 1211.16,825.71 1224.3,825.71 1258.45,791.56 U4_S1.9
NetC11_S2_2: C11_S2.2 R20_S2.1 R23_S2.2 U4_S2.9 | length 182.6
  Top Layer w8: U4_S2.9 2685.62,250.44 2719.77,216.29 2732.91,216.29 R23_S2.2 2739.73,170.06 C11_S2.2 2739.14,135.41 R20_S2.1
NetC12_2: C12.2 R28.2 R29.1 | length 137.3
  Top Layer w8: C12.2 213.11,380.88 223.54,370.44 R28.2@223.54,323.87 ; R28.2 R28.2@223.54,323.87 ; R28.2@225,325.32 R28.2@223.54,323.87 ; R29.1@296.46,323.87 R28.2@223.54,323.87
NetC13_2: C13.2 R29.2 R30.1 | length 154.8
  Top Layer w8: C13.2 343.11,380.88 353.54,370.44 R29.2 ; R29.2@353.67,323.75 356.41,321 R30.1
NetC14_1: C14.1 R33.1 U5.12 | length 126.4
  Top Layer w8: R33.1 532.32,547.21 C14.1 U5.12
NetC15_1: C15.1 R33.2 R34.1 | length 167.3
  Top Layer w8: R34.1 444.14,571.62 469.13,546.62 R33.2 498.27,499.8 C15.1
NetC18_2: C18.2 R35.1 R37.2 | length 200.6
  Top Layer w8: C18.2 928.11,834.01 957.01,805.12 R35.1 985.19,776.76 1005,756.95 R37.2
NetC19_2: C19.2 R36.2 R38.1 | length 290.4
  Top Layer w8: R36.2 469.13,823.15 480,834.01 C19.2 500.04,854.3 504.73,858.99 R38.1@686.43,858.99
NetC20_2: C20.2 R35.2 U5.5 | length 158.5
  Top Layer w8: U5.5 884.3,694.03 892.68,702.41 C20.2 892.68,771.77 R35.2@899.92,779.01
NetC21_2: C21.2 R36.1 U5.10 | length 158
  Top Layer w8: R36.1 534.68,768.29 C21.2 534.68,701.78 542.43,694.03 U5.10
NetD1_1: D1.1 R41.1 | length 53.1
  Top Layer w8: D1.1@518,915 520,913 R41.1
NetR1_S1_1: R1_S1.1 R3_S1.2 U1_S1.1 | length 160.4
  Top Layer w8: R1_S1.1 1832.15,234.28 1839.15,241.28 R3_S1.2
NetR1_S2_1: R1_S2.1 R3_S2.2 U1_S2.1 | length 320.7
  Top Layer w8: U1_S2.1@2104.92,800.72 R3_S2.2 U1_S2.1@2104.92,800.72 ; U1_S2.1@2104.92,800.72 U1_S2.1@2111.92,807.72 ; U1_S2.1@2104.92,800.72 U1_S2.1@2111.92,807.72 ; U1_S2.1@2111.92,807.72 R1_S2.1 U1_S2.1@2111.92,807.72
NetR2_S1_1: R2_S1.1 R4_S1.2 U2_S1.1 | length 163.8
  Top Layer w8: R4_S1.2 U2_S1.1 938.06,366.54 945.06,373.54 R2_S1.1
NetR2_S2_1: R2_S2.1 R4_S2.2 U2_S2.1 | length 327.6
  Top Layer w8: U2_S2.1@2999.01,668.46 R2_S2.1 U2_S2.1@2999.01,668.46 ; U2_S2.1@2999.01,668.46 U2_S2.1@3006.01,675.46 ; U2_S2.1@2999.01,668.46 U2_S2.1@3006.01,675.46 ; U2_S2.1@3006.01,675.46 U2_S2.1 ; U2_S2.1@3006.01,675.46 U2_S2.1 ; U2_S2.1 R4_S2.2 U2_S2.1
NetR5_S1_2: R5_S1.2 R7_S1.1 U1_S1.3 | length 274.5
  Top Layer w8: R7_S1.1@1831.16,461.54 1788.61,418.98 1788.61,349.58 1796.91,341.28 R5_S1.2
NetR5_S2_2: R5_S2.2 R7_S2.1 U1_S2.3 | length 550.9
  Top Layer w8: R7_S2.1@2112.91,580.46 R7_S2.1 R7_S2.1@2112.91,580.46 ; R7_S2.1@2112.91,580.46 2155.46,623.02 ; R7_S2.1@2112.91,580.46 2155.46,623.02 ; 2147.16,700.72 2155.46,692.42 ; 2147.16,700.72 R5_S2.2 2147.16,700.72 ; 2147.16,700.72 2155.46,692.42 ; 2155.46,623.02 2155.46,692.42 ; 2155.46,623.02 2155.46,692.42
NetR6_S1_2: R6_S1.2 R8_S1.1 U2_S1.3 | length 281.3
  Top Layer w8: R6_S1.2 U2_S1.3 983.61,266.54 993.61,256.54 993.61,195.08 959.76,161.24 959.76,160.25 946.05,146.54 R8_S1.1
NetR6_S2_2: R6_S2.2 R8_S2.1 U2_S2.3 | length 562.6
  Top Layer w8: 2950.46,785.46 2950.46,846.92 ; 2950.46,785.46 2950.46,846.92 ; 2950.46,785.46 2960.46,775.46 ; 2950.46,785.46 2960.46,775.46 ; 2950.46,846.92 R8_S2.1@2984.31,880.76 ; 2950.46,846.92 R8_S2.1@2984.31,880.76 ; 2960.46,775.46 U2_S2.3 ; 2960.46,775.46 U2_S2.3 ; R8_S2.1@2984.31,880.76 R8_S2.1@2984.31,881.75 ; R8_S2.1@2984.31,880.76 R8_S2.1@2984.31,881.75 ; R8_S2.1@2984.31,881.75 R8_S2.1@2998.02,895.46 ; R8_S2.1@2984.31,881.75 R8_S2.1@2998.02,895.46 ; R8_S2.1@2998.02,895.46 R8_S2.1 R8_S2.1@2998.02,895.46 ; U2_S2.3 R6_S2.2 U2_S2.3
NetR9_S1_1: R9_S1.1 R15_S1.2 U4_S1.3 | length 128.3
  Top Layer w8: U4_S1.3 1566.89,641.56 1576.91,631.54 R15_S1.2 1576.87,629.54 R9_S1.1
NetR9_S2_1: R9_S2.1 R15_S2.2 U4_S2.3 | length 128.3
  Top Layer w8: R9_S2.1 2367.2,412.46 R15_S2.2 2367.17,410.46 2377.19,400.44 U4_S2.3
NetR10_S1_1: R10_S1.1 R16_S1.1 U4_S1.12 | length 125.1
  Top Layer w8: R10_S1.1 R16_S1.1 1206.31,631.54 1216.33,641.56 U4_S1.12
NetR10_S2_1: R10_S2.1 R16_S2.1 U4_S2.12 | length 125.1
  Top Layer w8: U4_S2.12 2727.74,400.44 2737.76,410.46 R16_S2.1 R10_S2.1
NetR17_S1_2: R17_S1.2 R21_S1.2 U4_S1.5 | length 127.6
  Top Layer w8: U4_S1.5 1559.92,741.56 1574.91,756.54 R17_S1.2 R21_S1.2
NetR17_S2_2: R17_S2.2 R21_S2.2 U4_S2.5 | length 127.6
  Top Layer w8: R21_S2.2 R17_S2.2 2369.17,285.46 2384.15,300.44 U4_S2.5
NetR18_S1_1: R18_S1.1 R24_S1.2 U4_S1.10 | length 128.5
  Top Layer w8: R24_S1.2 1203.34,793.54 R18_S1.1 1205.31,756.54 1220.29,741.56 U4_S1.10
NetR18_S2_1: R18_S2.1 R24_S2.2 U4_S2.10 | length 128.5
  Top Layer w8: U4_S2.10 2723.78,300.44 2738.76,285.46 R18_S2.1 2740.73,248.46 R24_S2.2
NetR27_2: R27.2 R28.1 | length 87.6
  Top Layer w25: R27.2 81.44,322.43 165.02,322.43 R28.1@166.46,323.87
SHIFT1_S1: R19_S1.1 U3_S1.3 | length 800.5
  Top Layer w8: R19_S1.1 1421.92,893.92 1409.99,881.99 1409.99,279.67 1456.67,232.99 U3_S1.3
SHIFT1_S2: R19_S2.1 TP_SHIFT1_S2.1 U3_S2.3 | length 935.9
  Top Layer w8: v1@2407.2,154.81 R19_S2.1 2515.46,129.46 2539.46,153.46 2539.46,756.94 2487.4,809.01 U3_S2.3
  Bottom Layer w8: v1(2407.2,159.69) 2407.85,160.35 2453.35,160.35 TP_SHIFT1_S2.1
SHIFT2_S1: R13_S1.1 TP_SHIFT2_S1.1 U3_S1.8 | length 345.3
  Top Layer w8: U3_S1.8 1462.2,360.94 1445.61,377.54 1445.61,464.84 1458.27,477.5 R13_S1.1 1542.28,472.1 1542.28,459.36 1553.2,448.44 v1(1616.98,448.44)
SHIFT2_S2: R13_S2.1 TP_SHIFT2_S2.1 U3_S2.8 | length 334.7
  Top Layer w8: v1(2407.2,589.03) R13_S2.1 2485.8,564.5 2498.46,577.16 2498.46,664.46 2481.87,681.06 U3_S2.8
  Bottom Layer w8: v1(2407.2,589.03) 2409.08,587.15 2430.2,587.15 2452.85,564.5 TP_SHIFT2_S2.1
SHIFT3_S1: R14_S1.2 TP_SHIFT3_S1.1 U3_S1.13 | length 338.2
  Top Layer w8: v1(1244.34,446.62) R14_S1.2 1322.94,476.54 1335.61,463.87 1335.61,376.57 1319.02,359.98 U3_S1.13@1280.61,359.98
  Bottom Layer w8: v1(1244.34,446.62) 1247.02,449.3 1267.29,449.3 TP_SHIFT3_S1.1
SHIFT3_S2: R14_S2.2 TP_SHIFT3_S2.1 U3_S2.13 | length 342.6
  Top Layer w8: U3_S2.13@2663.46,682.02 2625.06,682.02 2608.46,665.43 2608.46,578.13 2621.13,565.46 R14_S2.2 v1(2699.73,595.32)
  Bottom Layer w8: TP_SHIFT3_S2.1 2674.86,595.32 v1(2699.73,595.32)
SHIFT4_S1: R20_S1.2 TP_SHIFT4_S1.1 U3_S1.18 | length 843.1
  Top Layer w8: U3_S1.18@1280.61,232.99 1327.28,232.99 1370.99,276.71 1370.99,883.15 1360.22,893.92 v1(1332.97,893.92) R20_S1.2
  Bottom Layer w8: TP_SHIFT4_S1.1 v1(1332.97,893.92)
SHIFT4_S2: R20_S2.2 TP_SHIFT4_S2.1 U3_S2.18 | length 948.8
  Top Layer w8: U3_S2.18@2663.46,809.01 2619.53,809.01 2567.46,756.94 2567.46,153.46 2591.46,129.46 R20_S2.2 v1(2699.73,159.69)
  Bottom Layer w8: TP_SHIFT4_S2.1 2645.65,160.35 2699.08,160.35 v1(2699.73,159.69)
SIG: R3_S1.1 R17_S1.1 R26.2 R31.2 R32.2 | length 2892.5
  Top Layer w8: R17_S1.1 v1(1703.27,756.54) ; R3_S1.1 v1(1987.15,276.54)
  Bottom Layer w8: R32.2 512.5,276.4 527.72,261.18 595.84,261.18 617.66,239.36 617.66,152.9 644.56,126 1551.57,126 1576.18,150.61 1698.46,150.61 1719.61,129.46 1956.92,129.46 1987.15,159.69 v1(1987.15,276.54) 2012.5,276.54 2037.74,301.78 2037.74,422.06 v1(1703.27,756.54)
  Bottom Layer w15: R26.2 R32.2 R31.2
SIG1_S2: C11_S1.1 R3_S2.1 R17_S2.1 R23_S1.1 TP_SIG4_S1.1 U4_S1.8 | length 1815.3
  Top Layer w8: v1(1140.61,832.54) R23_S1.1 1170.28,833.13 C11_S1.1 ; U4_S1.8 v1(1345.61,841.56) ; v1(1956.92,765.46) R3_S2.1 ; v1(2240.8,285.46) R17_S2.1
  Bottom Layer w8: TP_SIG4_S1.1 1110.06,861.53 1139.05,832.54 v1(1140.61,832.54) 1318.61,832.54 1324.95,838.88 1342.93,838.88 v1(1345.61,841.56) 1345.61,861.53 1350.29,866.22 1697.68,866.22 1798.43,765.46 1933.01,765.46 ; v1(1956.92,765.46) 1933.01,765.46 ; v1(2240.8,285.46) 1906.33,619.94 1906.33,740.22 1931.57,765.46 1933.01,765.46
SIG2_S1: C10_S1.2 R5_S1.1 R15_S1.1 R22_S1.2 TP_SIG1_S1.1 U4_S1.7 | length 1126.2
  Top Layer w8: v1(1435.61,841.56) U4_S1.7 ; C10_S1.2 1610.93,833.13 R22_S1.2 v1(1640.61,832.54) ; R15_S1.1 v1(1645.61,631.54) ; R5_S1.1 v1(1987.15,377.5)
  Bottom Layer w8: v1(1435.61,841.56) 1627.8,841.56 1636.82,832.54 1660.11,832.54 1673.61,819.04 1673.61,721.89 ; v1(1645.61,631.54) 1648.28,634.21 1661.28,634.21 1673.61,646.54 1673.61,721.89 ; v1(1987.15,377.5) 1987.15,408.35 1673.61,721.89
SIG2_S2: C10_S2.2 R5_S2.1 R15_S2.1 R22_S2.2 TP_SIG1_S2.1 U4_S2.7 | length 1129.3
  Top Layer w8: v1(1956.92,664.5) R5_S2.1 ; v1(2303.46,209.46) R22_S2.2 2333.14,208.87 C10_S2.2 ; v1(2303.46,409.46) 2303.96,409.96 2331.23,409.96 R15_S2.1 ; U4_S2.7 v1(2505.46,200.44)
  Bottom Layer w8: v1(1956.92,664.5) 1956.92,628.08 2270.46,314.54 ; 2283.96,408.96 2270.46,395.46 2270.46,314.54 ; 2283.96,409.46 v1(2303.46,409.46) ; v1@2300.79,206.79 v1(2303.46,209.46) ; v1(2505.46,200.44) 2312.48,200.44 v1(2303.46,209.46) ; 2270.46,314.54 2270.46,222.96 2283.96,209.46 v1(2303.46,209.46)
SIG3_S1: C6_S1.2 R4_S1.1 R11_S1.2 R16_S1.2 TP_SIG2_S1.1 U4_S1.1 | length 1417.1
  Top Layer w8: v1(790.06,331.59) R4_S1.1 ; v1(1085.61,632.54) 1086.11,632.04 1170.37,632.04 1170.87,632.54 v1(1170.87,660.54) ; v1(1435.61,541.56) U4_S1.1 ; C6_S1.2 1610.34,516.59 R11_S1.2 1611.14,556.8 1644.81,556.8 v1(1645.61,557.6)
  Bottom Layer w8: v1(790.06,331.59) 790.06,400.06 926.98,536.98 1050,536.98 1085.61,572.59 v1(1085.61,632.54) ; v1(1170.87,660.54) 1419.61,660.54 1435.61,644.53 v1(1435.61,541.56) 1534.16,541.56 1550.2,557.6 v1(1645.61,557.6) 1646.01,557.2 1692.89,557.2 TP_SIG2_S1.1
SIG3_S2: C6_S2.2 R4_S2.1 R11_S2.2 R16_S2.2 TP_SIG2_S2.1 U4_S2.1 | length 1402.2
  Top Layer w8: v1(2303.46,486) R11_S2.2 2333.73,525.41 C6_S2.2 ; U4_S2.1 v1(2505.46,500.44) ; v1(2773.2,381.46) 2773.2,409.46 2773.7,409.96 2857.96,409.96 v1(2858.46,409.46) ; R4_S2.1 v1(3154.01,710.41)
  Bottom Layer w8: v1@2305.15,486 v1(2303.46,486) 2395.46,486 2409.91,500.44 v1(2505.46,500.44) 2505.46,400.46 2524.46,381.46 v1(2773.2,381.46) ; v1(2858.46,409.46) 3062.55,409.46 3154.01,500.92 v1(3154.01,710.41)
SIG4_S1: C7_S1.1 R6_S1.1 R12_S1.1 R18_S1.2 TP_SIG3_S1.1 U4_S1.14 | length 1322.3
  Top Layer w8: R6_S1.1 790.06,236.82 805.81,221.07 815.32,221.07 v1(818,218.39) ; v1(1140.61,756.54) R18_S1.2 ; v1(1142.5,556) R12_S1.1 1170.28,555.41 C7_S1.1 ; U4_S1.14 1287.8,541.03 v1(1345.61,541.03)
  Bottom Layer w8: TP_SIG3_S1.1@817,161 v1@817,210.39 ; v1(818,218.39) 801.41,234.98 801.41,239.98 790.06,251.33 790.06,296.92 838.61,345.46 838.61,405.61 947,514 1116,514 1142.5,540.5 v1(1142.5,556) ; v1@1139.5,756.98 1124.98,756.98 1110,742 1110,569.5 1123.5,556 v1(1142.5,556) ; v1(1345.61,541.03) 1345.61,543.37 1332.97,556 v1(1142.5,556)
SIG4_S2: C7_S2.1 R6_S2.1 R12_S2.1 R18_S2.2 TP_SIG3_S2.1 U4_S2.14 | length 1252.8
  Top Layer w8: v1(2601.92,500.44) U4_S2.14 ; C7_S2.1 2773.79,486.59 R12_S2.1 v1(2801.57,486) ; R18_S2.2 v1(2803.46,285.46) ; R6_S2.1 v1(3154.01,809.01)
  Bottom Layer w8: v1(2601.92,500.44) 2787.13,500.44 v1(2801.57,486) ; v1@2804.57,285.02 2819.09,285.02 2834.07,300 2834.07,472.5 2820.57,486 v1(2801.57,486) ; v1(3154.01,809.01) 3105.46,760.46 3105.46,541.46 3050,486 v1(2801.57,486)
SIG5_S2: C11_S2.1 R23_S2.1 TP_SIG4_S2.1 U4_S2.8 | length 381.6
  Top Layer w8: v1(2601.92,200.44) U4_S2.8 ; C11_S2.1 2773.79,208.87 R23_S2.1 v1(2803.46,209.46)
  Bottom Layer w8: v1(2601.92,200.44) 2792.55,200.44 2801.57,209.46 v1(2803.46,209.46) 2803.87,209.87 2853.66,209.87 TP_SIG4_S2.1
SIG_BUFF: R31.1 R37.1 TP_SIGBUFF1.1 U5.1 U5.2 | length 747.5
  Top Layer w8: v1(735,215) 735,469.07 759.97,494.03 U5.1 U5.2 v1(872.6,544.03) ; R37.1 1005.47,625 v1(1005.47,585.96)
  Bottom Layer w8: R31.1 675.23,215 v1(735,215) 735.5,214.5 735.5,170.5 TP_SIGBUFF1.1 ; v1(872.6,544.03) 895.09,544.03 937.02,585.96 v1(1005.47,585.96)
SIGIN: J1.5 R25.1 R26.1 R27.1 | length 714.4
  Top Layer w25: R25.1 R27.1 80,146.69 94.64,132.04 411.27,132.04 v1(414.49,128.82)
  Power plane w25: v1(414.49,128.82) 414.49,124.73 450,89.21 J1.5
  Bottom Layer w25: R26.1 361.81,215.23 414.49,162.55 v1(414.49,128.82)
SIGIN_BUFF: R25.2 R30.2 U5.3 | length 892.9
  Top Layer w8: R30.2 456.81,210.76 506.33,161.24 635.24,161.24 686.46,212.46 686.46,538.46 742.03,594.03 U5.3
  Top Layer w25: R25.2 R30.2
Tap: C22.1 TP_TAP_1.1 TP_TAP_2.1 TP_TAP_3.1 TP_TAP_4.1 U1_S1.2 U1_S1.4 U1_S2.2 U1_S2.4 U2_S1.2 U2_S1.4 U2_S2.2 U2_S2.4 U3_S1.2 U3_S1.9 U3_S1.12 U3_S1.19 U3_S2.2 U3_S2.9 U3_S2.12 U3_S2.19 U6.5 | length 3455
  Top Layer w8: v1(180.01,626.79) 180.01,575.2 U6.5 C22.1 ; v1(869.37,216.84) 869.52,216.69 931.45,216.69 U2_S1.4 ; U2_S1.2 v1(1000.47,316.54) ; v1(1227.81,386.54) U3_S1.12 ; U3_S1.19 v1(1342.15,207.4) ; v1(1435.8,207.78) U3_S1.2@1499.34,207.78 ; U3_S1.9 v1(1551.09,386.54) ; v1(2037.74,650.93) 2037.85,650.83 2098.36,650.83 U1_S2.4 ; v1(2391.71,655.84) U3_S2.9@2442.2,655.84 ; U3_S2.2 v1(2507.01,834.6) ; v1(2600.66,834.98) U3_S2.19@2664.2,834.98 ; U3_S2.12@2664.2,655.84 v1(2714.99,655.84) ; v1(2949,726.38) 2949.46,725.92 3012,725.92 U2_S2.2 ; U2_S2.4 v1(3079.9,825.46)
  Bottom Layer w8: v1(869.37,216.84) 900.78,216.84 v1(1000.47,316.54) 1139.1,316.54 1209.1,386.54 v1(1227.81,386.54) 1230.49,383.86 1238.79,383.86 1354.94,267.71 1354.94,220.19 v1@1342.34,207.59 ; TP_TAP_3.1 1354.66,204.72 1344.83,204.72 v1(1342.15,207.4) v1@1342.34,207.59 ; v1(1551.09,386.54) 1435.8,271.24 v1(1435.8,207.78) 1435.61,207.59 v1@1342.34,207.59 ; v1(2037.74,650.93) 2153.45,650.93 2177.98,675.46 2372.09,675.46 v1(2391.71,655.84) 2468.83,732.96 2507.53,732.96 2524.46,749.9 2524.46,813.35 2507.01,830.81 v1(2507.01,834.6) 2507.2,834.79 2600.47,834.79 v1(2600.66,834.98) ; TP_TAP_1.1 2557.38,876.73 2599.14,834.98 v1(2600.66,834.98) ; TP_TAP_4.1 3081.46,875.17 3081.46,827.03 v1(3079.9,825.46) 2980.82,726.38 v1(2949,726.38) 2878.45,655.84 v1(2714.99,655.84) 2600.66,770.18 v1(2600.66,834.98)
pads on no net: J1.1 J1.2 J1.3 J1.4 J1.6 J1.7 J1.8 J1.9 J1.10 J1.11 J1.12 J1.13 J1.14 J1.15 J1.16 J1.17 J1.18 J1.19 J1.20 J1.21 J1.22 J1.23 J1.24 J1.25 J1.26 J1.27 J1.28 J1.29 J1.30 J1.31 J1.32 J2.2 J2.4 J2.5 J2.6 J2.7 J2.8 J2.9 J2.10 J2.11 J2.12 J2.13 J2.14 J2.15 J2.16 J2.25 J2.26 J2.27 J2.28 J2.29 J2.30 J2.31 J2.32 R40.1 R40.2 U3_S1.15 U3_S2.15 U6.1

## Polygon pours and split planes (outlines as drawn)
no net on Dimensions "Tap_Pout" (solid): 0,1060 0,0 3196.03,0 3200,3.97 3200,1060
+5 on Power plane "+5_L03_P001" (solid, pour order 1): 0,1060 0,0 3200,0 3200,1060
GND on Ground plane "GND_L02_P000" (solid, pour order 0): 0,1060 0,0 3200,0 3200,1060
GND on Bottom Layer "Tap_Pout" (solid, pour order 7): 0,1060 0,0 3200,0 3200,1060
Tap on Top Layer "TAP_L01_P006" (solid, remove dead copper, pour order 6): 11.37,1067.03 11.37,7.03 3211.37,7.03 3211.37,1067.03

## Keep-outs
Keep-Out Layer:
  the board outline again, w10

## Other copper
Top Layer:
  pour cut-out: 119.88,896.57 119.88,797.05 289.88,797.05 289.88,896.57

## Silkscreen, mask and mechanical layers (free items; w line width, h text height)
Top Overlay:
  text "5V" at 27,1020.91 h30
  text "GND" at 211,1020.91 h30
  text "B1" at 1631.48,1020.91 h30
  text "B2" at 1725.68,1020.91 h30
  text "B3" at 1825.68,1020.91 h30
  text "B4" at 1925.68,1020.91 h30
  text "B5" at 2025.68,1020.91 h30
  text "B6" at 2125.68,1020.91 h30
  text "B7" at 2225.68,1020.91 h30
  text "B8" at 2325.68,1020.91 h30
  text "BYPASS" at 172,128 h30
Bottom Overlay:
  text "LP" at 558,241 h30 r270
  text "BUFF" at 718,209 h30 r270
  text "SIGIN" at 393,186 h30 r270
Dimensions:
  the board outline again, w10

## Text inside footprints (layer, text, board x,y; h text height)
U1_S1: Top Overlay "*" at 1808.61,201.28 h30 r180
U1_S2: Top Overlay "*" at 2135.46,840.72 h30
U2_S1: Top Overlay "*" at 968.61,406.54 h30
U2_S2: Top Overlay "*" at 2975.46,635.46 h30 r180
U3_S1: Top Overlay "*" at 1469.61,151.97 h30 r180; Top Assembly "*" at 1475.61,219.97 h30 r180
U3_S2: Top Overlay "*" at 2474.46,890.03 h30; Top Assembly "*" at 2468.46,822.03 h30